# EAGLE board Fabulous Snaget (1) (EAGLE 7.6.0)

Size 56.82 x 53.33 mm. Coordinates in mm from the lower left corner, seen from the top.
Outline: 0,0 56.82,0 56.82,53.33 0,53.33 0,0
Copper layers (1*16): Top 0.035mm / dielectric 1.5mm / Bottom 0.035mm
Design rules "default": minimum track width 10mil, minimum drill 24mil, track to track 8mil, track to pad 8mil, pad to pad 8mil, via to via 8mil, smd to smd 8mil, copper to edge 40mil, drill to drill 8mil, minimum pad ring 10mil, minimum via ring 8mil, stop-mask expansion 4mil, vias tented up to drill 0mil, thermal gap 10mil

## Footprints (pad centres in the part's own frame; a part is rotated, then mirrored left to right if it is on the bottom)
DC-POWER = drill 0.889 pad 2.54 octagon: + 0,2.54; - 0,-2.54
C5B2.5 = drill 0.813 pad 1.6 octagon: 1 -2.54,0; 2 2.54,0
RADIAL-D11.36MM = drill 1.27 pad 1.905 square: + -2.54,0 | drill 1.27 pad 1.905: - 2.54,0
LED5MM = drill 0.813 octagon: A -1.27,0; K 1.27,0
0207/10 = drill 0.813 octagon: 1 -5.08,0; 2 5.08,0
TO220 = drill 1.118 long: 1 -2.54,-6.35; 2 0,-6.35; 3 2.54,-6.35 | hole 3.302: 0,11.176
DIL08 = drill 0.813 pad 1.27: 1 -3.81,-3.81; 2 -1.27,-3.81; 3 1.27,-3.81; 4 3.81,-3.81; 5 3.81,3.81; 6 1.27,3.81; 7 -1.27,3.81; 8 -3.81,3.81

## Placement (x,y rotation side)
BAT1  [DC-POWER]  5,60.88 0 top  (outside the outline)
C1  100nF  [C5B2.5]  5,98.98 0 top  (outside the outline)
C2  100nF  [C5B2.5]  5,111.68 0 top  (outside the outline)
C3  1uF  [RADIAL-D11.36MM]  5,162.48 0 top  (outside the outline)
D1  [LED5MM]  5,10.08 0 top
D2  [LED5MM]  5,22.78 0 top
R1  1k‎Ω  [0207/10]  5,35.48 0 top
R2  1k‎Ω  [0207/10]  5,48.18 0 top
R3  1k‎Ω  [0207/10]  5,124.38 0 top  (outside the outline)
R4  1k‎Ω  [0207/10]  5,149.78 0 top  (outside the outline)
T2  [TO220]  5,73.58 0 top  (outside the outline)
U1  [TO220]  5,86.28 0 top  (outside the outline)
U2  [DIL08]  5,137.08 0 top  (outside the outline)
U3  [DC-POWER]  5,175.18 0 top  (outside the outline)

## Library data of the parts
BAT1 C1-C3 D1 D2 R1-R4 T2 U1-U3 = AUTODESK_CIRCUITS_BREADBOARD

## Nets
N$1: D2.K R1.2
N$2: D1.A D2.A T2.3
N$3: D1.K R2.2
N$4: C3.+ R3.2 U2.2 U2.6
N$5: U2.5
N$6: T2.1 U2.3 U3.+
N$7: R3.1 R4.2 U2.7
N$8: BAT1.- C1.1 C2.2 C3.- R1.1 R2.1 U1.2 U2.1 U3.-
N$9: BAT1.+ C2.1 R4.1 U1.1 U2.4 U2.8
N$10: C1.2 T2.2 U1.3

## Tracks (layer width: path | path; a pad name or v marks a point on that pad's centre or on a via)
N$1  (1 unrouted)
N$2  (2 unrouted)
N$3  (1 unrouted)
N$4  (3 unrouted)
N$6  (2 unrouted)
N$7  (2 unrouted)
N$8  (8 unrouted)
N$9  (5 unrouted)
N$10  (2 unrouted)